# Altium PCB PCB1.PcbDoc
Units mm, origin at the board's own origin, x right, y up, seen from the top; angles counter-clockwise.
Board outline 88.27 x 66.03 mm, 2 copper layers (Top Layer, Bottom Layer); 40 components, 33 nets, 254 pads, 19 vias.
Unrouted connection lines stored in the file: 49.
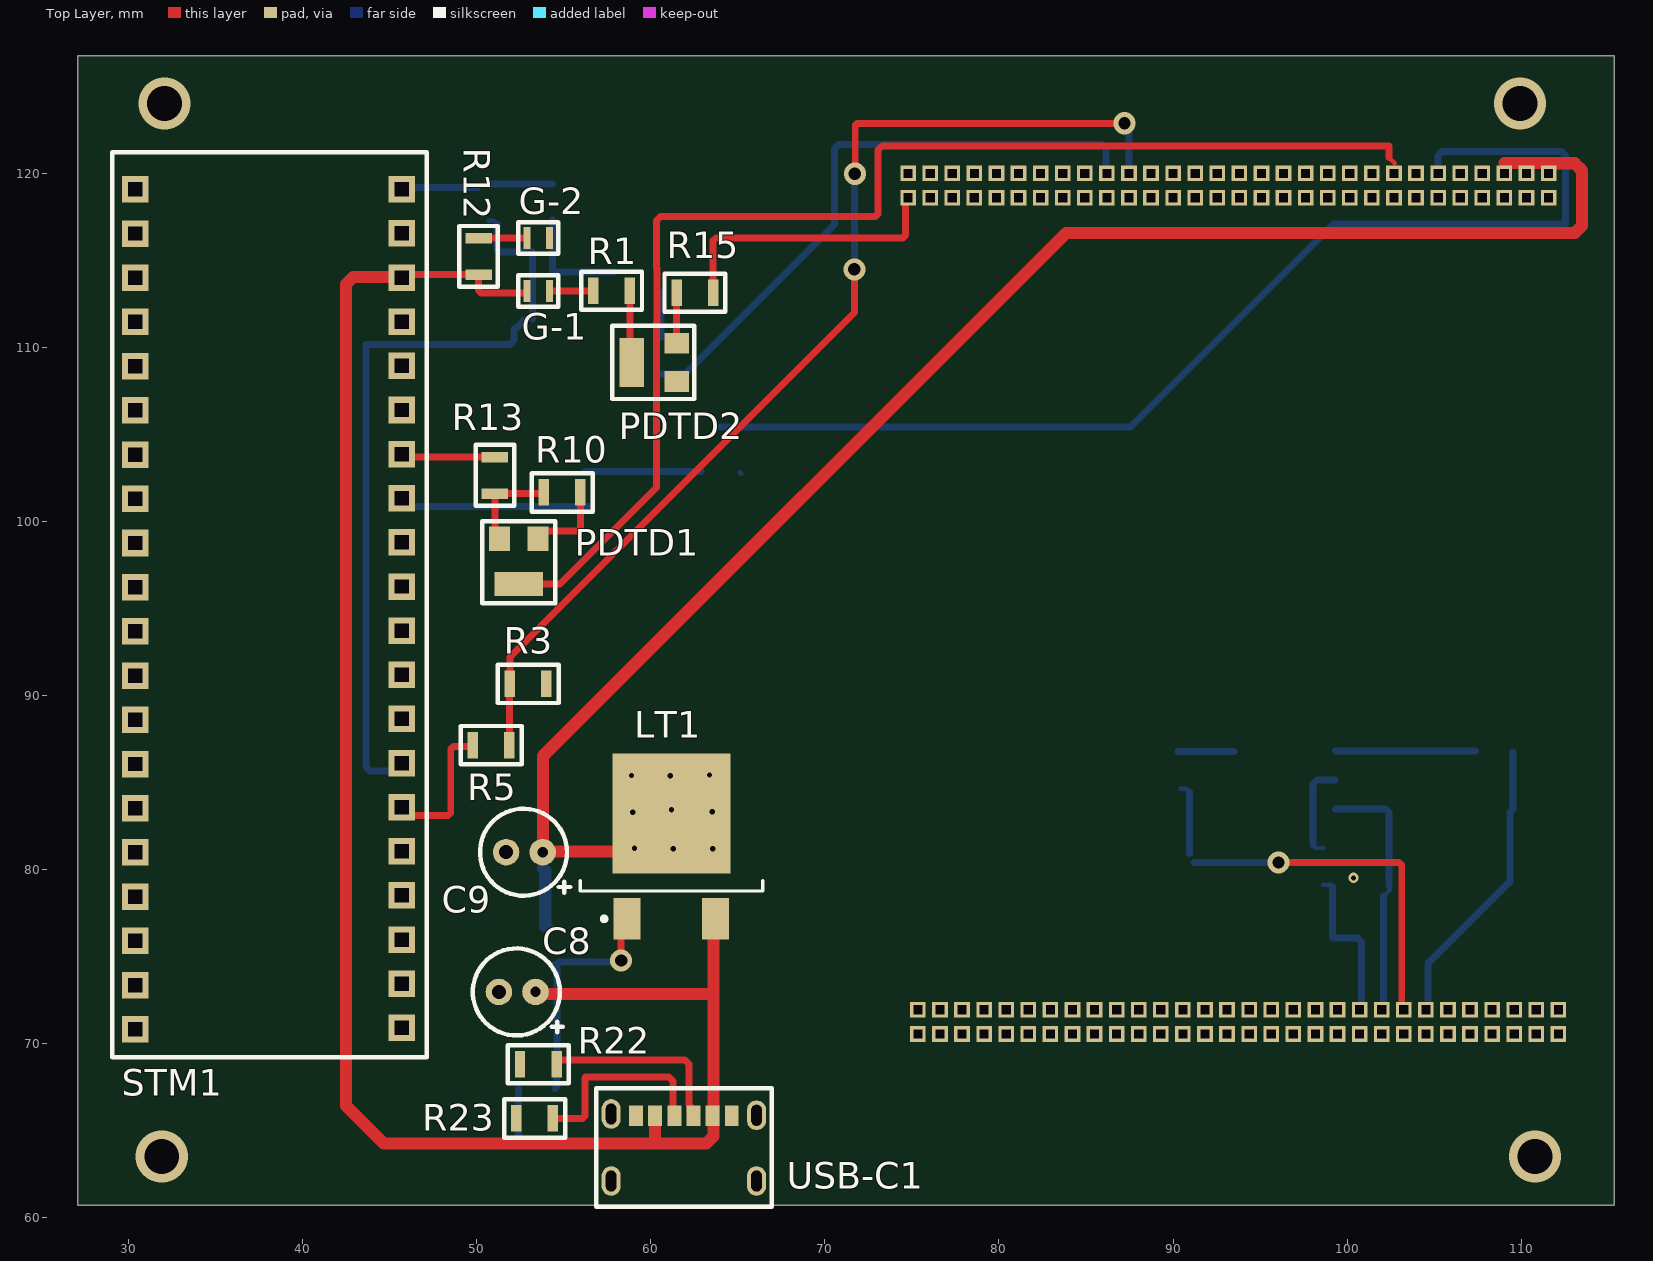
[diagram p0: Top Layer view]
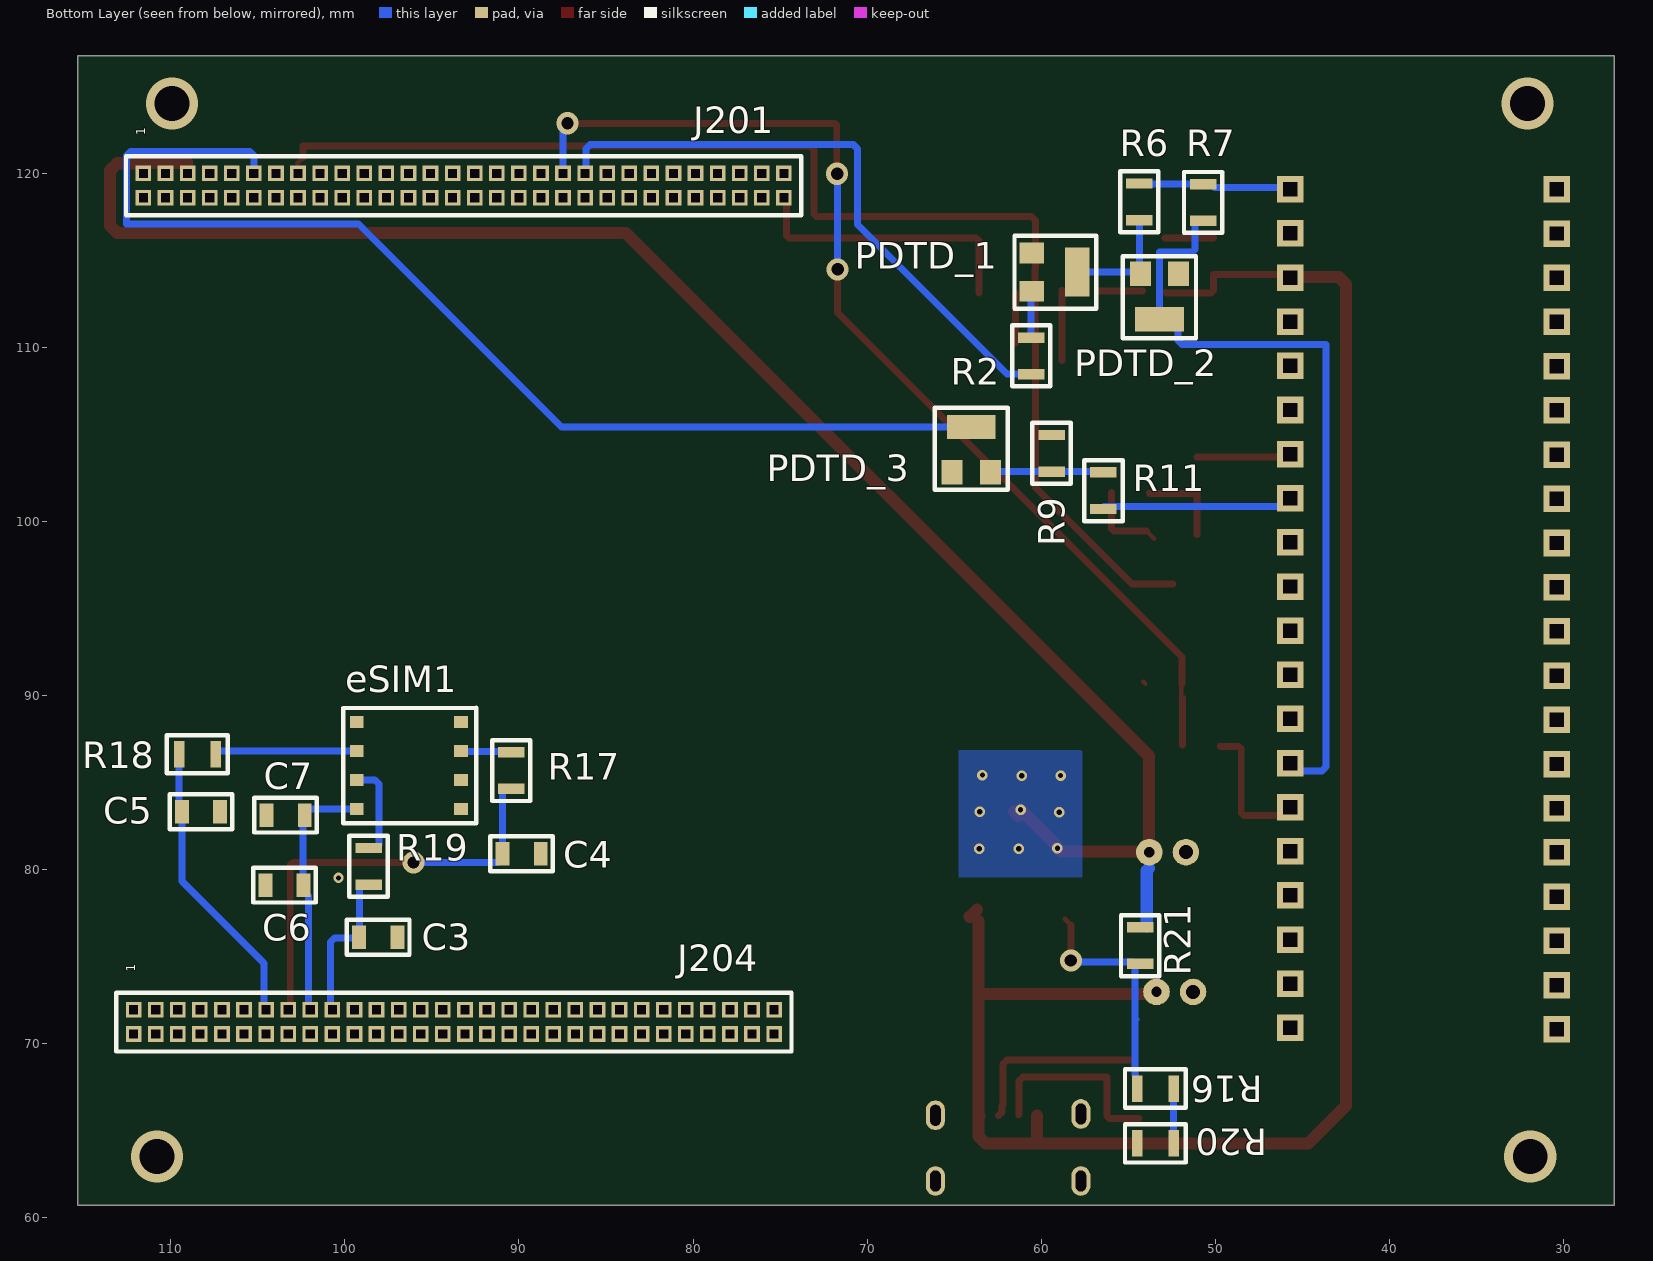
[diagram p1: Bottom Layer view, seen from below]

## Layer stack, top to bottom
Top Solder: solder mask 0.0102, Solder Resist, Dk 3.5
Top Layer: signal copper 0.0356
Dielectric 1: dielectric 0.32, FR-4, Dk 4.8
Bottom Layer: signal copper 0.0356
Bottom Solder: solder mask 0.0102, Solder Resist, Dk 3.5

## Board outline
27.077,60.707 27.077,126.733 115.343,126.733 115.343,60.707

## Design rules (kind name [scope] priority, off if disabled: settings)
Clearance [All] p1: gap=0.254 ignorepadtopadclearanceinfootprint=FALSE
ComponentClearance [All] p1: gap=0.254 collisioncheckmode=3 verticalgap=0 showdistances=FALSE
PolygonConnect [All] p1: connectstyle=Direct reliefconductorwidth=0.254 reliefentries=4 polygonreliefangle="90 Angle" airgapwidth=0.254
RoutingVias [All] p1: holewidth=0.711 width=1.27 viastyle="Through Hole" minholewidth=0.711 minwidth=1.27 maxholewidth=0.711 maxwidth=1.27
SolderMaskExpansion [All] p1: expansion=0.102 istentingtop=FALSE
Width [All] p1: maxlimit=0.254 minlimit=0.254 preferedwidth=0.254
29 further rules are at their usual default settings.

## Classes and differential pairs
component class eSIM: A7682E C3 C4 C5 C6 C7 C8 C9 eSIM1 J204 LT1 LT2 R16 R17 R18 R19 R20 R21 R22 R23 USB-C1
component class Чертёж: A7682E_J201 G-1 G-2 J201 LT1085_? PDTD1 PDTD2 PDTD_1 PDTD_2 PDTD_3 R1 R2 R3 R5 R6 R7 R9 R10 R11 R12 R13 R15 STM1 TVS_1

## Components (designator, comment, footprint, x,y, rotation, side; value= is the part's Value field where it differs from the comment)
C3 "CC080533pF" СС0805 98.09,76.09 r0 bottom value=33pF
C4 "CC080533pF" СС0805 89.85,80.89 r0 bottom value=33pF
C5 "CC080533pF" СС0805 108.27,83.3 r0 bottom value=33pF
C6 "capacitor" СС0805 103.47,79.09 r180 bottom value=1uF
C7 "capacitor" СС0805 103.41,83.11 r0 bottom value=100nF
C8 "capacitor" "CAP JAMOCON" 52.32,72.95 r180 top value=10uF
C9 "capacitor" "CAP JAMOCON" 52.73,80.98 r180 top value=10uF
eSIM1 "eSIM" ESIM 99.32,83.463 r90 bottom
G-1 "light diod" GNL-0805 53.58,113.22 r90 top (schematic designator GNL-1)
G-2 "light diod" GNL-0805 53.58,116.27 r90 top (schematic designator GNL-0805EC_1)
J201 "A7682E" A7682 111.578,118.58 r90 bottom (schematic designator A1)
J204 "A7682E" A7682 112.14,70.53 r90 bottom (schematic designator A7682E_J204)
LT1 "LT1085" LD1058-1 61.18,81.3 r90 top
PDTD1 "transistor" PDTD113ZT 51.31,98.99 r0 top
PDTD2 "transistor" PDTD113ZT 61.49,110.22 r270 top
PDTD_1 "transistor" PDTD113ZT 60.53,113.21 r90 bottom (schematic designator PDTD113ZT_1)
PDTD_2 "transistor" PDTD113ZT 54.3,114.21 r180 bottom (schematic designator PDTD113ZT_2)
PDTD_3 "transistor" PDTD113ZT 62.91,102.81 r0 bottom (schematic designator PDTD113ZT_3)
R1 "Resistor" R0805 57.74,113.24 r180 top value=300
R2 "Resistor" R0805 60.57,109.5 r90 bottom
R3 "Resistor" R0805 52.95,90.65 r0 top
R5 "Resistor" R0805 50.82,87.13 r180 top
R6 "Resistor" R0805 54.36,118.35 r270 bottom
R7 "Resistor" R0805 50.69,118.31 r90 bottom
R9 "Resistor" R0805 59.4,103.9 r270 bottom value=47k
R10 "Resistor" R0805 54.9,101.65 r180 top value=47k
R11 "Resistor" R0805 56.42,101.75 r270 bottom value=4.7k
R12 "Resistor" R0805 50.1,115.21 r90 top value=300
R13 "Resistor" R0805 51.04,102.63 r90 top value=4.7k
R15 "Resistor" R0805 62.53,113.12 r180 top value=1k
R16 "Resistor" R0805 53.43,67.4 r180 bottom value=6.8k
R17 "Resistor" R0805 90.44,85.67 r90 bottom value=22
R18 "Resistor" R0805 108.48,86.61 r180 bottom value=22
R19 "Resistor" R0805 98.64,80.17 r90 bottom value=22
R20 "Resistor" R0805 53.43,64.25 r0 bottom value=1k
R21 "Resistor" R0805 54.31,75.61 r90 bottom
R22 "Resistor" R0805 53.53,68.8 r180 top value=5.1k
R23 "Resistor" R0805 53.32,65.68 r180 top value=5.1k
STM1 "STM32F103C6T8" STM 30.38,70.806 r180 top
USB-C1 "USB-C" "USB C" 59.145,65.84 r0 top

## Footprints (in the part's own frame and the unit in brackets; to place one, negate y for a bottom-side part, rotate by r counter-clockwise, add the part's x,y. Pads: shape width x height; smd on the part's side, far side on the other; paste and mask are expansions set on the pad)
A7682 [mm]
  rect 0.9x0.9 hole 0.5 square: 1(1.4,0) 2(0,0) 3(1.4,-1.269) 4(0,-1.269) 5(1.4,-2.538) 6(0,-2.538) 7(1.4,-3.807) 8(0,-3.807) 9(1.4,-5.076) 10(0,-5.076) 11(1.4,-6.345) 12(0,-6.345) 13(1.4,-7.614) 14(0,-7.614) 15(1.4,-8.883) 16(0,-8.883) 17(1.4,-10.152) 18(0,-10.152) 19(1.4,-11.421) 20(0,-11.421) 21(1.4,-12.69) 22(0,-12.69) 23(1.4,-13.959) 24(0,-13.959) 25(1.4,-15.228) 26(0,-15.228) 27(1.4,-16.497) 28(0,-16.497) 29(1.4,-17.765) 30(0,-17.766) 31(1.4,-19.034) 32(0,-19.035) 33(1.4,-20.303) 34(0,-20.303) 35(1.4,-21.572) 36(0,-21.572) 37(1.4,-22.841) 38(0,-22.841) 39(1.4,-24.11) 40(0,-24.11) 41(1.4,-25.379) 42(0,-25.379) 43(1.4,-26.648) 44(0,-26.648) 45(1.4,-27.917) 46(0,-27.917) 47(1.4,-29.186) 48(0,-29.186) 49(1.4,-30.455) 50(0,-30.455) 51(1.4,-31.724) 52(0,-31.724) 53(1.4,-32.993) 54(0,-32.993) 55(1.4,-34.262) 56(0,-34.262) 57(1.4,-35.531) 58(0,-35.531) 59(1.4,-36.8) 60(0,-36.8)
  silkscreen extent -1,-37.8 2.38,1
"CAP JAMOCON" [mm]
  round 1.524 hole 0.6: 2(-1.05,0)
  round 1.524 hole 0.8: 3(1.05,0)
  silkscreen extent -2.63,-2.5 2.55,2.5
ESIM [mm]
  rect 0.7x0.8 smd: 1(0,0) 2(1.667,0) 3(3.333,0) 4(5,0) 5(0,-6) 6(1.667,-6) 7(3.333,-6) 8(5,-6)
  silkscreen extent -0.82,-6.88 5.82,0.77
GNL-0805 [mm]
  rect 1.25x0.4 smd: 0(0,0.7) 1(0,-0.6)
  silkscreen extent -0.9,-1.1 0.9,1.2
LD1058-1 [mm] "D-PAK, 3-Pads, Body 7,30x8,61mm (max), IPC Medium Density"
  rect 2.4x1.55 smd: Adj(-4.15,2.54) Vin(-4.15,-2.54)
  rect 6.9x6.8 smd: Vout(1.9,0)
  silkscreen extent -4.27,-5.25 -1.95,5.25, body extent -4.65,-5.25 3.75,5.25, height 4.65
PDTD113ZT [mm]
  rect 1.2x1.4 smd: 4(0,0) 6(2.2,0)
  rect 2.8x1.4 smd: 5(1.1,-2.6)
  silkscreen extent -1,-3.7 3.2,1
R0805 [mm] "test_resisot H = 0.5+-0.1 l=0.35+-0.20  L = 2+-0.1"
  rect 0.6x1.524 smd: 0(-1.05,0) 1(1.05,0)
  silkscreen extent -1.75,-1.1 1.75,1.1
STM [mil]
  rect 60x60 hole 31.5 square: 1(0,0) 2(0,-99.99) 3(0,-200) 4(0,-300) 5(0,-400) 6(0,-500) 7(0,-600) 8(0,-700) 9(0,-800) 10(0,-900) 11(0,-1000) 12(0,-1100) 13(0,-1200) 14(0,-1300) 15(0,-1400) 16(0,-1500) 17(0,-1600) 18(0,-1700) 19(0,-1800) 20(0,-1900) 21(-602.36,-3.21) 22(-602.36,-103.04) 23(-602.36,-202.87) 24(-602.36,-302.7) 25(-602.36,-402.53) 26(-602.36,-502.36) 27(-602.36,-602.2) 28(-602.36,-702.03) 29(-602.36,-801.86) 30(-602.36,-901.69) 31(-602.36,-1001.52) 32(-602.36,-1101.35) 33(-602.36,-1201.18) 34(-602.36,-1301.01) 35(-602.36,-1400.84) 36(-602.36,-1500.68) 37(-602.36,-1600.51) 38(-602.36,-1700.34) 39(-602.36,-1800.17) 40(-602.36,-1900)
  silkscreen extent -659,-1984 52,63
"USB C" [mm]
  rect 0.8x1.2 smd: 1(0,0) 2(1.1,0) 3(2.2,0) 4(3.3,0) 5(4.4,0) 6(5.5,0)
  oval 1.1x1.7 hole 0.6 slot 1.2 at 90 deg: 38(-1.43,-3.75) 38(-1.43,0.1) 38(6.925,-3.75) 38(6.925,0.025)
  silkscreen extent -2.28,-5.23 7.8,1.58
СС0805 [mm] "L = 2;  e=0.7; w=1.25"
  rect 0.8x1.35 smd: 2(-1.1,0) 3(1.1,0)
  silkscreen extent -1.8,-1 1.8,1

## Part data
C3 C4 C5: "CC0805_33pF"
C6: library part CC08051uF, "CC0805_1uF"
C7: library part CC0805100nF, "CC0805_100nF"
C8 C9: library part CE080510uF, "CE0805_10uF"
G-1 G-2: library part GNL-0805EC
PDTD1 PDTD2 PDTD_1 PDTD_2 PDTD_3: library part PDTD113ZT
R1 R12: library part CR0805300R, "CR0805_300R"
R2 R3 R5 R6 R7 R21: library part CR08053.3kR, "CR0805_3.3kR"
R9 R10: library part CR080547kR, "CR0805_47kR"
R11 R13: library part CR08054.7kR, "CR0805_4.7kR"
R15 R20: library part CR08051kR, "CR0805_1kR"
R16: library part CR08056.8kR, "CR0805_6.8kR"
R17 R18 R19: library part CR080522R, "CR0805_22R"
R22 R23: library part CR08055.1kR, "CR08055.1kR"

## Via types
v1: diameter 0.6, hole 0.3, Top Layer to Bottom Layer, tented both sides, 10 vias
v2: diameter 3, hole 2, Top Layer to Bottom Layer, 4 vias
v3: diameter 1.27, hole 0.711, Top Layer to Bottom Layer, 3 vias
v4: diameter 1.27, hole 0.711, Top Layer to Bottom Layer, tented both sides, 2 vias

## Nets (pads, with @x,y where several pads share a name; then routed paths per layer and width w, separated by ;. In a path a pad name is that pad's centre, name@x,y a point inside that pad or via, vN(x,y) a via of type N, cw(c..) or ccw(c..) an arc to the next point about the centre after c; other vN are vias at no path point)
GND: C3.2 C4.2 C5.2 C6.2 C7.3 C8.3 C9.3 eSIM1.5 G-2.1 J201.2 J201.4 J201.6 J204.2 J204.4 J204.6 J204.8 J204.10 J204.12 J204.21 J204.23 J204.27 J204.29 J204.31 J204.33 J204.35 J204.39 J204.41 J204.43 J204.44 J204.53 PDTD2.6 PDTD_1.6 PDTD_2.6 PDTD_3.6 R3.1 R9.0 R20.1 R22.1 R23.1 STM1.1 STM1.2 STM1.39 USB-C1.1 USB-C1.6 USB-C1.38 | length 0.3
  Top Layer w0.254: R3.1 R3.1@54.125,90.775
  Bottom Layer w0.254: PDTD_3.6 PDTD_3.6@65.19,102.73
  other v1: 100.369,79.5
NetA1_1: C9.2 J201.1 J201.3 J201.5 LT1.Vout R21.1 | length 97.6
  Top Layer w0.7: C9.2@53.8,81.41 53.8,86.5 83.86,116.56 113.08,116.56 113.49,116.97 113.49,120.15 113.08,120.56 111.617,120.56 ; C9.2@54.114,81.02 58.87,81.02 v1(59.06,81.21) 59.06,81.3 LT1.Vout@61.075,83.315 ; v1(61.18,83.42) LT1.Vout@61.42,83.18 ; LT1.Vout@61.315,83.075 LT1.Vout@61.42,83.18 ; LT1.Vout@61.56,83.32 LT1.Vout@61.42,83.18 ; 109.04,120.58 111.578,120.58
  Bottom Layer w0.254: R21.1@53.932,76.709 54.291,76.709 R21.1@54.34,76.66
  Bottom Layer w0.7: 53.8,80.06 53.932,79.928 R21.1@53.932,76.71
  other v1: 61.29,81.18 63.55,81.18 58.96,83.28 63.53,83.3 58.88,85.38 61.11,85.37 63.37,85.41
NetA1_11: J201.11 PDTD_3.5 | length 65.9
  Bottom Layer w0.4: PDTD_3.5 87.56,105.41 99.23,117.08 112.55,117.08 112.55,121.016 112.316,121.25 105.467,121.25 105.233,121.016 J201.11
NetA1_15: J201.15 PDTD1.5 | length 72.7
  Top Layer w0.254: 60.32,111.371 60.341,111.392 ; 60.32,114.529 60.341,114.508 ; 102.411,120.883 102.734,120.56
  Top Layer w0.4: PDTD1.5 54.78,96.39 60.32,101.93 60.32,111.371 ; 60.32,114.529 60.32,117.266 60.554,117.5 72.91,117.5 73.059,117.649 73.059,121.324 73.293,121.558 102.411,121.558 102.411,120.883 ; 60.341,111.392 60.341,114.508
NetA1_39: J201.39 R3.0 R5.0 | length 62.4
  Top Layer w0.254: 51.87,89.84 51.953,89.923 R3.0@51.953,90.65 ; v3(71.72,119.96) v3@71.74,119.98 ; 71.74,122.77 71.83,122.86
  Top Layer w0.4: R5.0 51.87,89.84 ; R3.0 51.9,92.202 71.69,111.992 v4(71.69,114.47) ; v3@71.74,119.98 71.74,122.77 ; 71.83,122.86 v3(87.21,122.86)
  Bottom Layer w0.254: v3@71.69,119.93 v3(71.72,119.96)
  Bottom Layer w0.4: v4(71.69,114.47) 71.69,119.097 v3@71.69,119.93 ; v3(87.21,122.86) 87.21,122.625 87.467,122.367 J201.39
NetA1_41: J201.41 R2.0 | length 35.3
  Bottom Layer w0.4: R2.0 61.96,108.45 70.558,117.048 70.558,121.396 70.792,121.63 85.906,121.63 86.14,121.396 J201.41@86.14,119.775
NetA1_60: J201.60 R15.0 | length 16.6
  Top Layer w0.254: J201.60@74.64,118.46 J201.60@74.927,118.747
  Top Layer w0.4: R15.0 63.58,116.116 63.729,116.265 74.491,116.265 74.64,116.414 J201.60@74.64,118.46
NetA7682E_J204_13: C5.3 J204.13 R18.0 | length 16.8
  Bottom Layer w0.254: C5.3 C5.3@109.54,83.47
  Bottom Layer w0.4: J204.13@104.66,71.94 104.66,74.6 109.37,79.31 C5.3 ; C5.3@109.54,83.47 R18.0@109.54,86.74
NetA7682E_J204_15: C4.3 J204.15 R17.0 | length 24.5
  Top Layer w0.4: v4(96.06,80.39) 102.991,80.39 103.14,80.241 J204.15@103.14,72.171
  Bottom Layer w0.254: R17.0 90.777,84.62 R17.0@90.95,84.447 ; v4(96.06,80.39) v4@96.31,80.39
  Bottom Layer w0.4: C4.3 R17.0@90.95,84.447 ; C4.3@91.193,80.39 v4(96.06,80.39)
NetA7682E_J204_17: C6.3 C7.2 eSIM1.1 J204.17 | length 14.6
  Bottom Layer w0.254: C6.3@102.102,78.457 102.45,78.805 C6.3@102.45,79.08 ; C7.2@102.227,83.463 C7.2@102.4,83.29
  Bottom Layer w0.4: eSIM1.1 C7.2@102.227,83.463 ; J204.17@102.102,71.94 C6.3@102.102,78.457 ; C6.3@102.4,79.08 C7.2@102.4,83.29
NetA7682E_J204_19: C3.3 J204.19 R19.0 | length 9
  Bottom Layer w0.254: R19.0 R19.0@99.102,79.12
  Bottom Layer w0.4: R19.0@99.154,78.978 99.154,76.09 99.185,76.059 100.599,76.059 100.833,75.824 J204.19@100.833,71.94
NetC8_2: C8.2 G-1.0 LT1.Vin R12.0 STM1.38 USB-C1.2 USB-C1.5 | length 105.7
  Top Layer w0.254: G-1.0@52.807,113.12 52.88,113.193 G-1.0 ; C8.2 C8.2@53.48,72.84
  Top Layer w0.4: STM1.38@45.628,114.16 R12.0 50.1,113.269 50.249,113.12 G-1.0@52.807,113.12
  Top Layer w0.7: STM1.38@45.82,114.024 42.896,114.024 42.486,113.614 42.486,66.414 44.65,64.25 63.185,64.25 63.595,64.66 USB-C1.5@63.595,65.89 ; C8.2@53.48,72.84 63.595,72.84 ; 60.245,64.51 USB-C1.2 ; USB-C1.5 USB-C1.5@63.595,65.89 ; USB-C1.5@63.595,66.325 USB-C1.5@63.595,65.89 ; USB-C1.5@63.595,66.395 63.595,72.84 ; LT1.Vin@63.595,77.025 63.595,72.84 ; LT1.Vin@63.675,77.695 LT1.Vin@64.1,77.27
NeteSIM1_2: eSIM1.2 R19.1 | length 5.6
  Bottom Layer w0.254: R19.1@98.031,81.393 98.204,81.22 R19.1
  Bottom Layer w0.4: R19.1@98.031,81.393 98.031,84.896 98.265,85.13 eSIM1.2
NeteSIM1_3: eSIM1.3 R18.1 | length 8.1
  Bottom Layer w0.254: R18.1@107.383,86.797 R18.1@107.44,86.74
  Bottom Layer w0.4: eSIM1.3 R18.1@107.383,86.797
NeteSIM1_7: eSIM1.7 R17.1 | length 3.2
  Bottom Layer w0.4: R17.1@90.29,86.764 eSIM1.7@93.512,86.764
NetGNL-1_1: G-1.1 R1.1 | length 2.5
  Top Layer w0.4: G-1.1 R1.1@56.67,113.22
NetGNL-0805EC_1_0: G-2.0 R12.1 | length 2.8
  Top Layer w0.4: R12.1 G-2.0@52.87,116.26
NetLT1_Adj: LT1.Adj R16.0 R21.0 | length 13.9
  Top Layer w0.254: LT1.Adj@58.29,76.8 LT1.Adj
  Top Layer w0.4: v3(58.29,74.76) LT1.Adj@58.29,76.8
  Bottom Layer w0.254: R21.0@54.34,74.56 54.612,74.56 R21.0@54.712,74.66 ; 54.48,71.368 54.612,71.5 ; v3@58.19,74.66 v3(58.29,74.76)
  Bottom Layer w0.4: R16.0 54.58,67.5 54.58,68.164 54.612,68.196 54.612,71.5 R21.0@54.612,74.52 ; R21.0@54.712,74.66 v3@58.19,74.66
NetPDTD1_4: PDTD1.4 R10.1 R13.0 | length 5.2
  Top Layer w0.254: R10.1@53.78,101.58 R10.1
  Top Layer w0.4: PDTD1.4@51.04,99.24 R13.0 R10.1@53.78,101.58
NetPDTD1_6: PDTD1.6 R10.0 | length 4.8
  Top Layer w0.254: PDTD1.6 PDTD1.6@53.95,99.43
  Top Layer w0.4: PDTD1.6@53.95,99.43 55.801,99.43 55.95,99.579 R10.0
NetPDTD2_4: PDTD2.4 R15.1 | length 2.9
  Top Layer w0.4: PDTD2.4@61.48,110.23 R15.1
NetPDTD2_5: PDTD2.5 R1.0 | length 4
  Top Layer w0.4: PDTD2.5@58.79,109.22 R1.0
NetPDTD113ZT_1_4: PDTD_1.4 R2.1 | length 2.7
  Bottom Layer w0.254: PDTD_1.4 PDTD_1.4@60.57,113.17
  Bottom Layer w0.4: R2.1 PDTD_1.4@60.57,113.17
NetPDTD113ZT_1_5: PDTD_1.5 PDTD_2.4 R6.1 | length 6.7
  Bottom Layer w0.254: PDTD_2.4 54.36,114.27 PDTD_2.4@54.4,114.31
  Bottom Layer w0.4: PDTD_2.4@54.36,114.27 R6.1 ; PDTD_2.4@54.4,114.31 PDTD_1.5
NetPDTD113ZT_2_5: PDTD_2.5 R7.0 STM1.27 | length 45.1
  Bottom Layer w0.254: R7.0 50.979,117.26 R7.0@51.152,117.087 ; PDTD_2.5@52.131,111.037 52.204,111.11 PDTD_2.5@52.28,111.11 ; PDTD_2.5@52.762,111.61 52.78,111.61 PDTD_2.5
  Bottom Layer w0.4: STM1.27@45.82,85.656 43.873,85.656 43.639,85.89 43.639,110.139 51.897,110.139 52.131,110.373 PDTD_2.5@52.131,111.037 ; R7.0@51.152,117.087 51.152,115.616 51.301,115.467 53.2,115.467 PDTD_2.5 ; PDTD_2.5@52.28,111.11 PDTD_2.5@52.78,111.61
NetPDTD113ZT_3_4: PDTD_3.4 R9.1 R11.0 | length 6.7
  Bottom Layer w0.254: R11.0@56.21,102.86 R11.0@56.215,102.855 ; R9.1@59.395,102.855 R9.1 ; PDTD_3.4@62.87,102.85 PDTD_3.4
  Bottom Layer w0.4: R11.0@56.215,102.855 R9.1@59.395,102.855 ; R9.1 PDTD_3.4@62.87,102.85
NetR5_1: R5.1 STM1.26 | length 7.8
  Top Layer w0.254: 48.351,83.077 48.5,83.226 ; R5.1@49.696,87.056 R5.1
  Top Layer w0.4: STM1.26@45.82,83.077 48.351,83.077 ; 48.5,83.226 48.5,86.907 48.649,87.056 R5.1@49.696,87.056
NetR6_0: R6.0 R7.1 STM1.40 | length 8.9
  Bottom Layer w0.254: STM1.40@45.82,119.182 STM1.40@45.985,119.347 ; R7.1@50.05,119.182 50.228,119.36 R7.1 R7.1@50.71,119.38 ; R6.0@54.34,119.38 R6.0
  Bottom Layer w0.4: STM1.40@45.82,119.182 R7.1@50.05,119.182 ; R7.1@50.71,119.38 R6.0@54.34,119.38
NetR11_1: R11.1 STM1.33 | length 10.1
  Bottom Layer w0.4: STM1.33@46.3,100.83 R11.1@56.377,100.83
NetR13_1: R13.1 STM1.34 | length 5.2
  Top Layer w0.4: STM1.34@45.878,103.68 R13.1
NetR16_1: R16.1 R20.0 | length 3.1
  Bottom Layer w0.4: R20.0 R16.1
NetR22_0: R22.0 USB-C1.4 | length 10.9
  Top Layer w0.254: R22.0 54.58,68.877 R22.0@54.753,69.05
  Top Layer w0.4: R22.0@54.753,69.05 55.58,69.05 61.965,69.05 62.199,68.816 62.199,66.474 62.245,66.428 62.245,66.04 USB-C1.4
NetR23_0: R23.0 USB-C1.3 | length 11.3
  Top Layer w0.254: 56.21,68.048 56.23,68.068 ; USB-C1.3@61.28,65.905 USB-C1.3
  Top Layer w0.4: R23.0 56.061,65.68 56.21,65.829 56.21,68.048 ; 56.23,68.068 61.046,68.068 61.28,67.834 USB-C1.3@61.28,65.905
pads on no net: eSIM1.4 eSIM1.6 eSIM1.8 J201.7 J201.8 J201.9 J201.10 J201.12 J201.13 J201.14 J201.16 J201.17 J201.18 J201.19 J201.20 J201.21 J201.22 J201.23 J201.24 J201.25 J201.26 J201.27 J201.28 J201.29 J201.30 J201.31 J201.32 J201.33 J201.34 J201.35 J201.36 J201.37 J201.38 J201.40 J201.42 J201.43 J201.44 J201.45 J201.46 J201.47 J201.48 J201.49 J201.50 J201.51 J201.52 J201.53 J201.54 J201.55 J201.56 J201.57 J201.58 J201.59 J204.1 J204.3 J204.5 J204.7 J204.9 J204.11 J204.14 J204.16 J204.18 J204.20 J204.22 J204.24 J204.25 J204.26 J204.28 J204.30 J204.32 J204.34 J204.36 J204.37 J204.38 J204.40 J204.42 J204.45 J204.46 J204.47 J204.48 J204.49 J204.50 J204.51 J204.52 J204.54 J204.55 J204.56 J204.57 J204.58 J204.59 J204.60 STM1.3 STM1.4 STM1.5 STM1.6 STM1.7 STM1.8 STM1.9 STM1.10 STM1.11 STM1.12 STM1.13 STM1.14 STM1.15 STM1.16 STM1.17 STM1.18 STM1.19 STM1.20 STM1.21 STM1.22 STM1.23 STM1.24 STM1.25 STM1.28 STM1.29 STM1.30 STM1.31 STM1.32 STM1.35 STM1.36 STM1.37
copper on no net:
  other v2: 31.9,63.5 110.8,63.5 32.05,124 109.93,124

## Polygon pours and split planes (outlines as drawn)
NetA1_1 on Bottom Layer "NETA1_1_L02_P005" (solid, pour order 5): 64.72,86.84 57.62,86.84 57.61,86.83 57.65,86.79 57.65,79.54 64.73,79.54 64.72,79.55 64.72,86.83
GND on Bottom Layer "GND_L02_P002" (solid, pour order 2): 20.497,203.38 107.263,203.38 107.263,138.47 19.997,138.47
GND on Top Layer "GND_L01_P000" (solid, pour order 0): 126.372,159.63 213.168,159.63 213.168,94.69 125.872,94.69

## Silkscreen, mask and mechanical layers (free items; w line width, h text height)
Mechanical 1:
  lines w0.254: 73.99,126.86 115.35,126.86 115.47,126.74 115.47,60.58 26.95,60.58 26.95,126.83 26.98,126.86 74.22,126.86

## Text inside footprints (layer, text, board x,y; h text height)
J201: Bottom Overlay "1" at 111.482,122.159 h0.5 r270
J204: Bottom Overlay "1" at 112.044,74.109 h0.5 r270